# Altium PCB NBP1 Xilinx Spartan-IIE PQ208 Rev1.02.PcbDoc
Units mm, origin at the board's own origin, x right, y up, seen from the top; angles counter-clockwise.
Board outline 69 x 80.99 mm, 2 copper layers (Top Layer, Bottom Layer); 48 components, 166 nets, 518 pads, 189 vias.
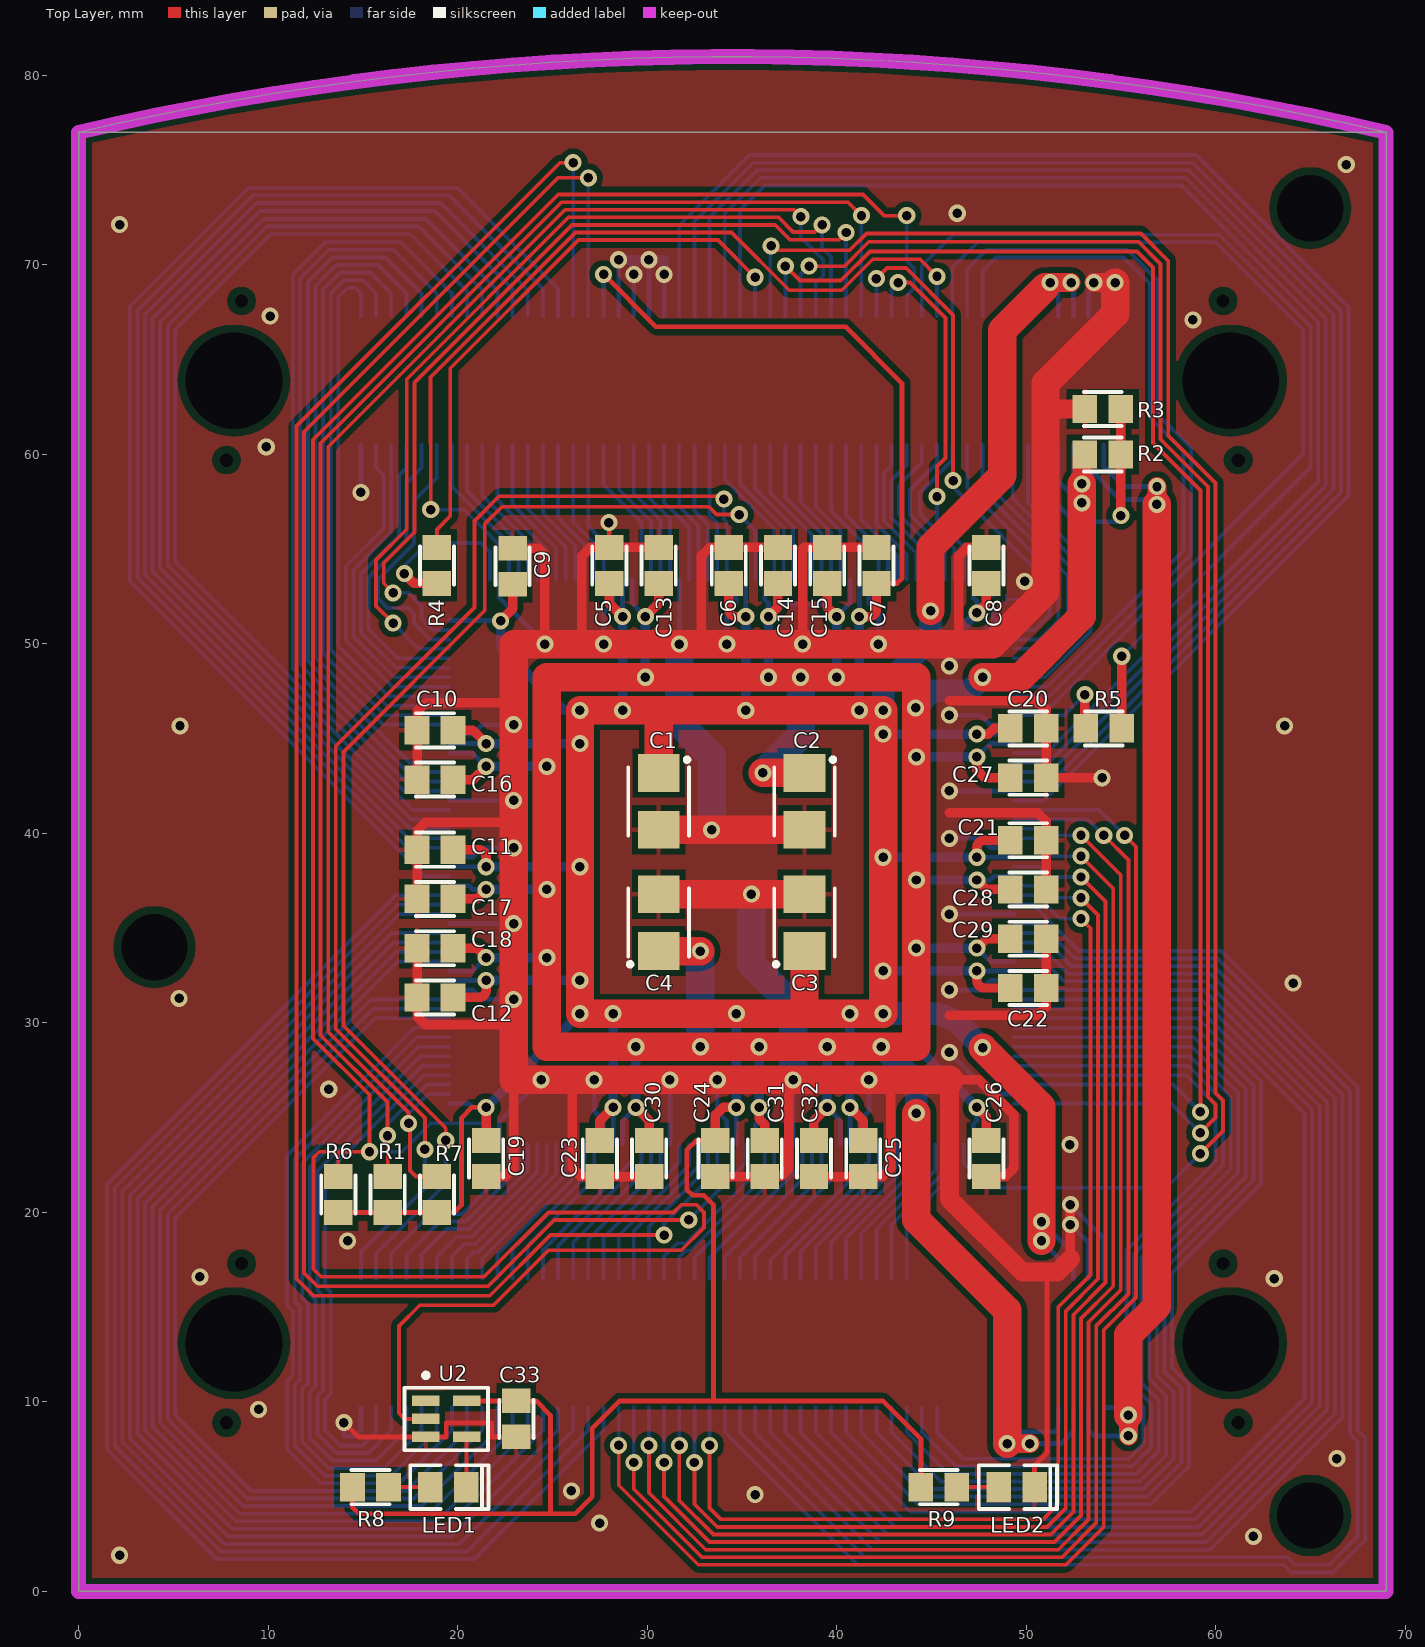
[diagram p0: Top Layer view]
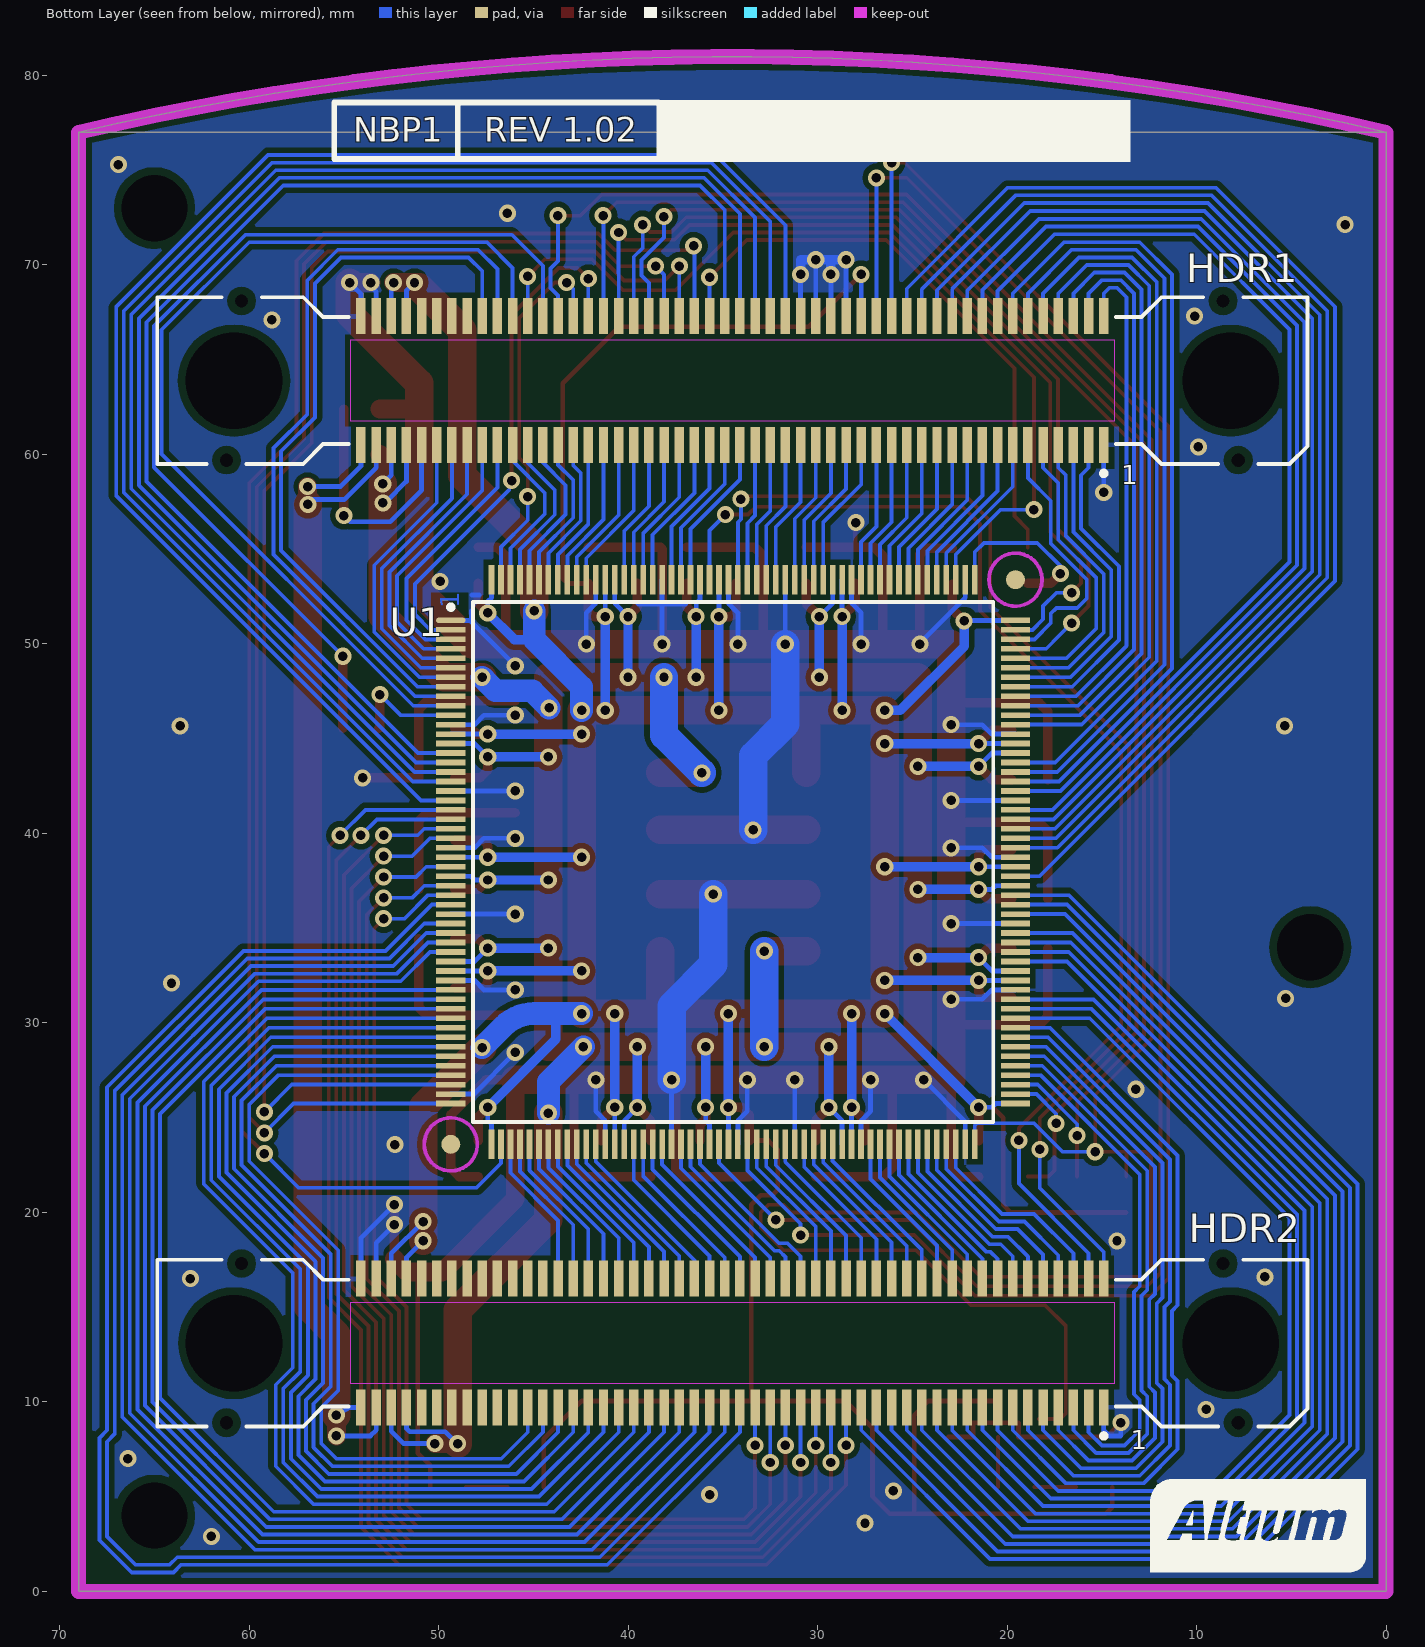
[diagram p1: Bottom Layer view, seen from below]

## Layer stack, top to bottom
Top Layer: signal copper 0.0356
Dielectric: core 0.32, FR-4, Dk 4.8
Bottom Layer: signal copper 0.0356

## Board outline
0,0 0,77 ccw(c0.001,77) 0.001,77 cw(c34.5,-69.801) 0.001,77 69,77 69,0

## Design rules (kind name [scope] priority, off if disabled: settings)
Clearance Clearance_Unplated_Pads [PadIsPlated = 'False'] p1: gap=0.4 // Slightly larger clearance around unplated holes
Clearance Clearance_Polygons [InPolygon] p2: gap=0.3 // Larger clearance for polygons
Clearance [All] p3: gap=0.2 // General clearance
ComponentClearance [All] p1: gap=0.2 collisioncheckmode=3 verticalgap=0.254 showdistances=FALSE
FabricationTestPointUsage TestPointUsage [All] p1 off: valid=0 allowmultiple=FALSE
FabricationTestpoint Testpoint [All] p1 off: side=3 testpointundercomponent=TRUE minsize=1.016 maxsize=2.54 preferedsize=1.524 minholesize=0 maxholesize=1.016 preferedholesize=0.813 testpointgrid=0.025 allowsidetop=TRUE allowsidebottom=TRUE usegrid=TRUE gridtolerance=0
Height MaxMinHeight [All] p1: minheight=0 maxheight=25.4 prefheight=12.7
HoleSize [All] p1: absolutevalues=TRUE maxlimit=5.1 minlimit=0.4 maxpercent=80.000 minpercent=20.000
PlaneClearance [All] p1: clearance=0.5
PlaneConnect [All] p1: planeconnectstyle=Relief reliefexpansion=0.5 reliefentries=4 reliefconductorwidth=0.25 reliefairgap=0.25
PolygonConnect PolygonConnect_ID_Pads [InPadClass('Satellite ID Pads')] p1: connectstyle=NoConnect reliefconductorwidth=0.254 reliefentries=4 polygonreliefangle="90 Angle" // Prevent polygons connecting to pads identifying type of Satellite PCB
PolygonConnect [All] p2: connectstyle=Relief reliefconductorwidth=0.25 reliefentries=4 polygonreliefangle="90 Angle"
RoutingCorners [All] p1: cornerstyle=45-Degree minsetback=2.5 maxsetback=2.5
RoutingVias [All] p1: holewidth=0.5 width=0.9 viastyle="Through Hole" minholewidth=0.5 minwidth=0.9 maxholewidth=0.5 maxwidth=0.9
SMDNeckDown [All] p1: percent=100.000
SilkscreenOverComponentPads [All] p1: minsilkscreentomaskgap=0.254
SolderMaskExpansion SolderMaskExpansion_Vias [IsVia] p1: expansion=-0.46
SolderMaskExpansion [All] p2: expansion=0.1
Width Width_Power [InNetClass('Power Nets')] p1: maxlimit=2.5 minlimit=0.15 preferedwidth=0.25
Width [All] p2: maxlimit=0.5 minlimit=0.2 preferedwidth=0.2
19 further rules are at their usual default settings.

## Classes and differential pairs
net class "Power Nets": 5V GND VCC VCCINT
pad class "Satellite ID Pads": HDR1-36 HDR1-38 HDR1-40 HDR1-42

## Components (designator, comment, footprint, x,y, rotation, side; value= is the part's Value field where it differs from the comment)
C1 "10uF" MCCT-B 30.608,41.692 r270 top locked
C2 "10uF" MCCT-B 38.308,41.692 r270 top locked
C3 "10uF" MCCT-B 38.308,35.292 r90 top locked
C4 "10uF" MCCT-B 30.608,35.292 r90 top locked
C5 "0.1uF" CC2012-0805 28.008,54.142 r270 top
C6 "0.1uF" CC2012-0805 34.308,54.142 r270 top
C7 "0.1uF" CC2012-0805 42.108,54.142 r270 top
C8 "0.1uF" CC2012-0805 47.908,54.142 r270 top
C9 "0.1uF" CC2012-0805 22.9,54.1 r270 top
C10 "0.1uF" CC2012-0805 18.808,45.442 r0 top
C11 "0.1uF" CC2012-0805 18.808,39.142 r0 top
C12 "0.1uF" CC2012-0805 18.808,31.342 r0 top
C13 "0.1uF" CC2012-0805 30.608,54.142 r270 top
C14 "0.1uF" CC2012-0805 36.908,54.142 r270 top
C15 "0.1uF" CC2012-0805 39.508,54.142 r270 top
C16 "0.1uF" CC2012-0805 18.808,42.842 r0 top
C17 "0.1uF" CC2012-0805 18.808,36.542 r0 top
C18 "0.1uF" CC2012-0805 18.808,33.942 r0 top
C19 "0.1uF" CC2012-0805 21.508,22.842 r270 top
C20 "0.1uF" CC2012-0805 50.108,45.542 r0 top
C21 "0.1uF" CC2012-0805 50.108,39.642 r0 top
C22 "0.1uF" CC2012-0805 50.108,31.842 r0 top
C23 "0.1uF" CC2012-0805 27.508,22.842 r270 top
C24 "0.1uF" CC2012-0805 33.608,22.842 r270 top
C25 "0.1uF" CC2012-0805 41.408,22.842 r270 top
C26 "0.1uF" CC2012-0805 47.908,22.842 r270 top
C27 "0.1uF" CC2012-0805 50.108,42.942 r0 top
C28 "0.1uF" CC2012-0805 50.108,37.042 r0 top
C29 "0.1uF" CC2012-0805 50.108,34.442 r0 top
C30 "0.1uF" CC2012-0805 30.108,22.842 r270 top
C31 "0.1uF" CC2012-0805 36.208,22.842 r270 top
C32 "0.1uF" CC2012-0805 38.808,22.842 r270 top
C33 "0.1uF" CC2012-0805 23.1,9.1 r270 top
HDR1 "54075-1009" 54075 34.5,63.9 r0 bottom locked
HDR2 "54075-1009" 54075 34.5,13.1 r0 bottom locked
LED1 "HSMG-C170" "SMD _LED" 19.5,5.5 r180 top locked
LED2 "HSMH-C170" "SMD _LED" 49.5,5.5 r180 top locked
R1 "4K7" CC2012-0805 16.308,20.942 r270 top
R2 "DO NOT INSTALL" CC2012-0805 54.05,60 r0 top
R3 "DO NOT INSTALL" CC2012-0805 54.05,62.4 r180 top
R4 "100R" CC2012-0805 18.908,54.142 r270 top
R5 "100R" CC2012-0805 54.1,45.542 r180 top
R6 "4K7" CC2012-0805 13.708,20.942 r270 top
R7 "4K7" CC2012-0805 18.908,20.942 r270 top
R8 "270R" CC2012-0805 15.4,5.5 r0 top
R9 "270R" CC2012-0805 45.4,5.5 r0 top
U1 "Spartan XC2S300E-6PQ208C" F-QFP28X28-G208/P.5N 34.458,38.492 r180 bottom locked
U2 "SN74LVC1G04DBV" SO-G5/P.95 19.4,9.1 r270 top

## Footprints (in the part's own frame and the unit in brackets; to place one, negate y for a bottom-side part, rotate by r counter-clockwise, add the part's x,y. Pads: shape width x height; smd on the part's side, far side on the other; paste and mask are expansions set on the pad)
54075 [mm] "Connector; Docking Station, Receptacle; 100 Position; Vertical"
  rect 0.5x1.9 smd: 1(-19.6,3.4) 2(-19.6,-3.4) 3(-18.8,3.4) 4(-18.8,-3.4) 5(-18,3.4) 6(-18,-3.4) 7(-17.2,3.4) 8(-17.2,-3.4) 9(-16.4,3.4) 10(-16.4,-3.4) 11(-15.6,3.4) 12(-15.6,-3.4) 13(-14.8,3.4) 14(-14.8,-3.4) 15(-14,3.4) 16(-14,-3.4) 17(-13.2,3.4) 18(-13.2,-3.4) 19(-12.4,3.4) 20(-12.4,-3.4) 21(-11.6,3.4) 22(-11.6,-3.4) 23(-10.8,3.4) 24(-10.8,-3.4) 25(-10,3.4) 26(-10,-3.4) 27(-9.2,3.4) 28(-9.2,-3.4) 29(-8.4,3.4) 30(-8.4,-3.4) 31(-7.6,3.4) 32(-7.6,-3.4) 33(-6.8,3.4) 34(-6.8,-3.4) 35(-6,3.4) 36(-6,-3.4) 37(-5.2,3.4) 38(-5.2,-3.4) 39(-4.4,3.4) 40(-4.4,-3.4) 41(-3.6,3.4) 42(-3.6,-3.4) 43(-2.8,3.4) 44(-2.8,-3.4) 45(-2,3.4) 46(-2,-3.4) 47(-1.2,3.4) 48(-1.2,-3.4) 49(-0.4,3.4) 50(-0.4,-3.4) 51(0.4,3.4) 52(0.4,-3.4) 53(1.2,3.4) 54(1.2,-3.4) 55(2,3.4) 56(2,-3.4) 57(2.8,3.4) 58(2.8,-3.4) 59(3.6,3.4) 60(3.6,-3.4) 61(4.4,3.4) 62(4.4,-3.4) 63(5.2,3.4) 64(5.2,-3.4) 65(6,3.4) 66(6,-3.4) 67(6.8,3.4) 68(6.8,-3.4) 69(7.6,3.4) 70(7.6,-3.4) 71(8.4,3.4) 72(8.4,-3.4) 73(9.2,3.4) 74(9.2,-3.4) 75(10,3.4) 76(10,-3.4) 77(10.8,3.4) 78(10.8,-3.4) 79(11.6,3.4) 80(11.6,-3.4) 81(12.4,3.4) 82(12.4,-3.4) 83(13.2,3.4) 84(13.2,-3.4) 85(14,3.4) 86(14,-3.4) 87(14.8,3.4) 88(14.8,-3.4) 89(15.6,3.4) 90(15.6,-3.4) 91(16.4,3.4) 92(16.4,-3.4) 93(17.2,3.4) 94(17.2,-3.4) 95(18,3.4) 96(18,-3.4) 97(18.8,3.4) 98(18.8,-3.4) 99(19.6,3.4) 100(19.6,-3.4)
  round 0.5 hole 0.7 unplated: MH1(-26.7,4.2) MH2(-25.9,-4.2) MH3(26.7,4.2) MH4(25.9,-4.2)
  round 4.8 hole 5.1 unplated: MH5(-26.3,0) MH6(26.3,0)
  Top Layer keep-out region: -20.15,2.15 20.15,2.15 20.15,-2.15 -20.15,-2.15
  silkscreen extent -30.35,-4.4 30.35,5.02
CC2012-0805 [mm]
  rect 1.3x1.5 smd: 1(-0.95,0) 2(0.95,0)
  silkscreen extent -1,-0.9 1,0.9
F-QFP28X28-G208/P.5N [mm]
  oval 1.55x0.3 smd: 1(-14.9,12.75)
  rect 1.55x0.3 smd: 2(-14.9,12.25) 3(-14.9,11.75) 4(-14.9,11.25) 5(-14.9,10.75) 6(-14.9,10.25) 7(-14.9,9.75) 8(-14.9,9.25) 9(-14.9,8.75) 10(-14.9,8.25) 11(-14.9,7.75) 12(-14.9,7.25) 13(-14.9,6.75) 14(-14.9,6.25) 15(-14.9,5.75) 16(-14.9,5.25) 17(-14.9,4.75) 18(-14.9,4.25) 19(-14.9,3.75) 20(-14.9,3.25) 21(-14.9,2.75) 22(-14.9,2.25) 23(-14.9,1.75) 24(-14.9,1.25) 25(-14.9,0.75) 26(-14.9,0.25) 27(-14.9,-0.25) 28(-14.9,-0.75) 29(-14.9,-1.25) 30(-14.9,-1.75) 31(-14.9,-2.25) 32(-14.9,-2.75) 33(-14.9,-3.25) 34(-14.9,-3.75) 35(-14.9,-4.25) 36(-14.9,-4.75) 37(-14.9,-5.25) 38(-14.9,-5.75) 39(-14.9,-6.25) 40(-14.9,-6.75) 41(-14.9,-7.25) 42(-14.9,-7.75) 43(-14.9,-8.25) 44(-14.9,-8.75) 45(-14.9,-9.25) 46(-14.9,-9.75) 47(-14.9,-10.25) 48(-14.9,-10.75) 49(-14.9,-11.25) 50(-14.9,-11.75) 51(-14.9,-12.25) 52(-14.9,-12.75) 105(14.9,-12.75) 106(14.9,-12.25) 107(14.9,-11.75) 108(14.9,-11.25) 109(14.9,-10.75) 110(14.9,-10.25) 111(14.9,-9.75) 112(14.9,-9.25) 113(14.9,-8.75) 114(14.9,-8.25) 115(14.9,-7.75) 116(14.9,-7.25) 117(14.9,-6.75) 118(14.9,-6.25) 119(14.9,-5.75) 120(14.9,-5.25) 121(14.9,-4.75) 122(14.9,-4.25) 123(14.9,-3.75) 124(14.9,-3.25) 125(14.9,-2.75) 126(14.9,-2.25) 127(14.9,-1.75) 128(14.9,-1.25) 129(14.9,-0.75) 130(14.9,-0.25) 131(14.9,0.25) 132(14.9,0.75) 133(14.9,1.25) 134(14.9,1.75) 135(14.9,2.25) 136(14.9,2.75) 137(14.9,3.25) 138(14.9,3.75) 139(14.9,4.25) 140(14.9,4.75) 141(14.9,5.25) 142(14.9,5.75) 143(14.9,6.25) 144(14.9,6.75) 145(14.9,7.25) 146(14.9,7.75) 147(14.9,8.25) 148(14.9,8.75) 149(14.9,9.25) 150(14.9,9.75) 151(14.9,10.25) 152(14.9,10.75) 153(14.9,11.25) 154(14.9,11.75) 155(14.9,12.25) 156(14.9,12.75)
  rect 0.3x1.55 smd: 53(-12.75,-14.9) 54(-12.25,-14.9) 55(-11.75,-14.9) 56(-11.25,-14.9) 57(-10.75,-14.9) 58(-10.25,-14.9) 59(-9.75,-14.9) 60(-9.25,-14.9) 61(-8.75,-14.9) 62(-8.25,-14.9) 63(-7.75,-14.9) 64(-7.25,-14.9) 65(-6.75,-14.9) 66(-6.25,-14.9) 67(-5.75,-14.9) 68(-5.25,-14.9) 69(-4.75,-14.9) 70(-4.25,-14.9) 71(-3.75,-14.9) 72(-3.25,-14.9) 73(-2.75,-14.9) 74(-2.25,-14.9) 75(-1.75,-14.9) 76(-1.25,-14.9) 77(-0.75,-14.9) 78(-0.25,-14.9) 79(0.25,-14.9) 80(0.75,-14.9) 81(1.25,-14.9) 82(1.75,-14.9) 83(2.25,-14.9) 84(2.75,-14.9) 85(3.25,-14.9) 86(3.75,-14.9) 87(4.25,-14.9) 88(4.75,-14.9) 89(5.25,-14.9) 90(5.75,-14.9) 91(6.25,-14.9) 92(6.75,-14.9) 93(7.25,-14.9) 94(7.75,-14.9) 95(8.25,-14.9) 96(8.75,-14.9) 97(9.25,-14.9) 98(9.75,-14.9) 99(10.25,-14.9) 100(10.75,-14.9) 101(11.25,-14.9) 102(11.75,-14.9) 103(12.25,-14.9) 104(12.75,-14.9) 157(12.75,14.9) 158(12.25,14.9) 159(11.75,14.9) 160(11.25,14.9) 161(10.75,14.9) 162(10.25,14.9) 163(9.75,14.9) 164(9.25,14.9) 165(8.75,14.9) 166(8.25,14.9) 167(7.75,14.9) 168(7.25,14.9) 169(6.75,14.9) 170(6.25,14.9) 171(5.75,14.9) 172(5.25,14.9) 173(4.75,14.9) 174(4.25,14.9) 175(3.75,14.9) 176(3.25,14.9) 177(2.75,14.9) 178(2.25,14.9) 179(1.75,14.9) 180(1.25,14.9) 181(0.75,14.9) 182(0.25,14.9) 183(-0.25,14.9) 184(-0.75,14.9) 185(-1.25,14.9) 186(-1.75,14.9) 187(-2.25,14.9) 188(-2.75,14.9) 189(-3.25,14.9) 190(-3.75,14.9) 191(-4.25,14.9) 192(-4.75,14.9) 193(-5.25,14.9) 194(-5.75,14.9) 195(-6.25,14.9) 196(-6.75,14.9) 197(-7.25,14.9) 198(-7.75,14.9) 199(-8.25,14.9) 200(-8.75,14.9) 201(-9.25,14.9) 202(-9.75,14.9) 203(-10.25,14.9) 204(-10.75,14.9) 205(-11.25,14.9) 206(-11.75,14.9) 207(-12.25,14.9) 208(-12.75,14.9)
  round 1 smd paste-0.51 mask+1: FID1(-14.9,-14.9) FID2(14.9,14.9)
  Top Layer keep-out circle w0.2: c-14.9,-14.9 r1.4
  Top Layer keep-out circle w0.2: c14.9,14.9 r1.4
  silkscreen extent -15.03,-13.72 13.73,13.73
MCCT-B [mm]
  rect 2x2.2 smd: 1(-1.5,0) 2(1.5,0)
  silkscreen extent -2.3,-1.6 1.8,1.6
"SMD _LED" [mm]
  rect 1.3x1.6 smd: 1(0.95,0) 2(-0.95,0)
  silkscreen extent -2.13,-1.15 2,1.15
SO-G5/P.95 [mm]
  rect 0.55x1.45 smd: 1(-0.95,-1.075) 2(0,-1.075) 3(0.95,-1.075) 4(0.95,1.075) 5(-0.95,1.075)
  silkscreen extent -2.42,-2.2 1.65,2.2

## Part data
C1 C2 C3 C4: library part CAP_POLAR, "Polar Capacitor"
C5 C6 C7 C8 C9 C10 C11 C12 C13 C14 C15 C16 C17 C18 C19 C20 C21 C22 C23 C24 C25 C26 C27 C28 C29 C30 C31 C32 C33: library part CAP, "Capacitor"
HDR1 HDR2: "Board-to-Board, Docking Station, 0.80mm (.031\") Pitch, Shielded Receptacle, Vertical, Ultra Low Profile, SMT"
LED1 LED2: library part HSMX-C670, "Typical RED GaAs SMD LED Agilent make"
R1 R2 R3 R4 R5 R6 R7 R8 R9: library part RES, "Resistor"
U1: library part XC2S300E-6PQ208I, "1.8V Field-Programmable Gate Array"
U2: library part SN74AHC1G04DBVR

## Free pads (board coordinates)
  round 3.2 hole 3.5 unplated: LP(4,34) LP(65,4) LP(65,73)

## Via types
v1: diameter 0.9, hole 0.5, Top Layer to Bottom Layer, 189 vias

## Nets (pads, with @x,y where several pads share a name; then routed paths per layer and width w, separated by ;. In a path a pad name is that pad's centre, name@x,y a point inside that pad or via, vN(x,y) a via of type N, cw(c..) or ccw(c..) an arc to the next point about the centre after c; other vN are vias at no path point)
5V: HDR1.97 HDR1.99 HDR2.97 HDR2.99 | length 65.5
  Top Layer w1: v1(55.4,8.2) v1(55.4,9.3) ; v1(56.9,57.364) v1(56.911,58.304)
  Top Layer w1.5: v1(55.4,9.3) 55.4,13.538 56.9,15.038 v1(56.9,57.364)
  Bottom Layer w0.25: HDR2.97 53.3,8.5 53.6,8.2 v1(55.4,8.2) ; HDR1.97 53.3,59.3 54.982,57.618 56.646,57.618 v1(56.9,57.364) ; HDR2.99 54.7,9.7 v1(55.4,9.3) ; HDR1.99 54.1,59.375 54.77,58.718 55.184,58.304 v1(56.911,58.304)
AUDIO_SPI_CSN: HDR1.11 U1.154 | length 14.3
  Bottom Layer w0.2: HDR1.11 18.9,58.761 17.7,57.561 17.7,55.3 15.8,53.4 15.8,52.4 16.3,51.9 17.4,51.9 17.7,51.6 17.7,51.1 18.558,50.242 U1.154
BLUE0: HDR1.14 U1.139 | length 42.9
  Bottom Layer w0.2: U1.139 17.258,42.742 11.3,48.7 11.3,69.5 13,71.2 17,71.2 19.7,68.5 HDR1.14
BLUE1: HDR1.16 U1.138 | length 51.8
  Bottom Layer w0.2: U1.138 17.177,42.242 5.1,54.319 5.1,66.6 10.125,71.625 17.5,71.625 20.5,68.625 HDR1.16
BOC_CTS: HDR1.13 U1.160 | length 8.6
  Bottom Layer w0.2: HDR1.13 19.7,58.3 23.208,54.792 U1.160
BOC_RTS: HDR1.17 U1.162 | length 8.3
  Bottom Layer w0.2: HDR1.17 21.3,57.831 24.208,54.923 U1.162
BOC_RX: HDR1.19 U1.163 | length 8.2
  Bottom Layer w0.2: HDR1.19 22.1,57.597 24.708,54.989 U1.163
BOC_TX: HDR1.15 U1.161 | length 8.4
  Bottom Layer w0.2: HDR1.15 20.5,58.065 23.708,54.857 U1.161
BUZZER: HDR2.24 U1.93 | length 8.5
  Bottom Layer w0.2: HDR2.24 23.7,18.26 27.208,21.768 U1.93
CAN_RXD: HDR1.4 U1.147 | length 30.5
  Bottom Layer w0.2: HDR1.4 15.7,68.5 15,69.2 14,69.2 13.3,68.5 13.3,49.7 16.258,46.742 U1.147
CAN_TXD: HDR1.2 U1.148 | length 28.1
  Bottom Layer w0.2: HDR1.2 14.9,68.5 14.6,68.8 14.2,68.8 13.7,68.3 13.7,49.9 16.358,47.242 U1.148
FPGA_CCLK: HDR1.66 U1.155 | length 47.3
  Top Layer w0.2: v1(16.6,52.7) 16.1,53.2 16.1,54.272 17.719,55.891 17.719,63.79 26.044,72.115 36.768,72.115 37.549,71.334 40.122,71.334 v1(40.503,71.715)
  Bottom Layer w0.2: v1(16.6,52.7) 17.4,52.7 18.1,52 18.1,51.3 18.658,50.742 U1.155 ; HDR1.66 v1(40.503,71.715)
FPGA_CLK: HDR2.2 U1.182 | length 64.5
  Top Layer w0.2: v1(18.275,23.325) 18.275,24.979 13.571,29.683 13.571,44.606 20.894,51.928 20.894,56.496 22.197,57.8 33.895,57.8 v1(34.051,57.643)
  Bottom Layer w0.2: HDR2.2 14.9,17.918 18.275,21.293 v1(18.275,23.325) ; v1(34.051,57.643) 34.051,56.577 34.208,56.42 U1.182
FPGA_CLK_1: HDR1.30 U1.80 | length 100.5
  Top Layer w0.2: v1(26.1,75.4) 25.4,75.4 11.5,61.5 11.5,16.5 12.4,15.6 21.7,15.6 24.9,18.8 v1(30.9,18.8)
  Bottom Layer w0.2: HDR1.30 v1(26.1,75.4) ; v1(30.9,18.8) 30.9,19.4 33.708,22.208 U1.80
FPGA_CLK_2: HDR1.32 U1.77 | length 99.5
  Top Layer w0.2: v1(26.9,74.6) 25.3,74.6 11.9,61.2 11.9,16.8 12.6,16.1 21.6,16.1 25.1,19.6 v1(32.2,19.6)
  Bottom Layer w0.2: HDR1.32 v1(26.9,74.6) ; v1(32.2,19.6) 35.208,22.608 U1.77
FPGA_DIN: HDR1.64 U1.153 | length 48.4
  Top Layer w0.2: v1(16.6,51.1) 15.7,52 15.7,54.438 17.312,56.05 17.312,63.968 25.86,72.515 36.934,72.515 37.709,71.74 38.852,71.74 v1(39.233,72.121)
  Bottom Layer w0.2: v1(16.6,51.1) 17.933,49.742 U1.153 ; v1(39.233,72.121) 39.233,70.9 39.7,70.433 HDR1.64
FPGA_DONE: HDR1.74 R6.1 U1.104 U2.2 | length 147.6
  Top Layer w0.2: 13.7,23.2 R6.1 ; U2.2 17.2,9.1 16.9,9.4 16.9,14 18,15.1 21.9,15.1 24.8,18 31.8,18 33,19.2 33,20 32.6,20.4 31.8,20.4 31.4,20 24.8,20 21.4,16.6 12.8,16.6 12.4,17 12.4,22.9 12.7,23.2 v1(15.35,23.2) 15.35,26.207 12.371,29.186 12.371,60.779 25.313,73.722 41.392,73.722 42.509,72.604 v1(43.703,72.604)
  Bottom Layer w0.2: v1(15.35,23.2) 17.083,23.2 18.586,24.703 21.597,24.703 21.708,24.592 U1.104 ; HDR1.74 43.7,68.385 44.1,68.785 44.1,69.819 43.703,70.216 v1(43.703,72.604)
FPGA_INIT: HDR1.68 R1.1 U1.107 | length 84.6
  Top Layer w0.2: v1@16.3,24.075 16.3,25.823 12.771,29.351 12.771,60.595 25.491,73.315 40.604,73.315 v1(41.315,72.604) ; R1.1 v1@16.308,24.05
  Bottom Layer w0.2: v1(16.3,24.05) 16.3,24.656 18.387,26.742 U1.107 ; HDR1.68 41.3,72.385 v1@41.519,72.604 ; v1@41.315,72.4 v1(41.315,72.604)
FPGA_M0: HDR1.60 U1.52 | length 80.3
  Top Layer w0.2: v1(38.547,69.937) 40.413,69.937 41.701,71.226 55.927,71.226 57.1,70.053 57.1,60.8 59.6,58.3 59.6,26.1 60,25.7 60,25 v1(59.2,24.2)
  Bottom Layer w0.2: HDR1.60 38.1,69.49 v1(38.547,69.937) ; U1.52 57.658,25.742 v1(59.2,24.2)
FPGA_M1: HDR1.58 U1.50 | length 79.4
  Top Layer w0.2: v1(37.3,69.939) 38.064,69.175 40.216,69.175 41.756,70.715 55.852,70.715 56.7,69.867 56.7,60.6 59.2,58.1 v1(59.2,25.3)
  Bottom Layer w0.2: HDR1.58 v1(37.3,69.939) ; U1.50 57.758,26.742 v1(59.2,25.3)
FPGA_M2: HDR1.56 U1.54 | length 89.9
  Top Layer w0.2: v1(36.54,71.004) 36.286,70.775 40.685,70.775 41.574,71.664 56.059,71.664 57.5,70.223 57.5,61 60,58.5 60,26.3 60.4,25.9 60.4,24.3 v1(59.2,23.1)
  Bottom Layer w0.2: HDR1.56 36.5,70.964 v1(36.54,71.004) v1@36.5,70.908 ; U1.54 46.708,22.592 48,21.3 57.4,21.3 v1(59.2,23.1)
FPGA_PROGRAM: HDR1.62 R7.1 U1.106 | length 80.9
  Top Layer w0.2: R7.1 17.808,21.892 17.492,22.208 17.492,24.742 v1(17.414,24.7) 17.414,25.274 13.171,29.517 13.171,60.411 25.675,72.915 37.753,72.915 v1(38.115,72.553)
  Bottom Layer w0.2: v1(17.414,24.7) 17.414,25.204 18.452,26.242 U1.106 ; v1(38.115,72.553) 38.115,71.452 39.3,70.267 39.3,69.446 38.9,69.046 HDR1.62
FPGA_TCK: HDR1.72 U1.207 | length 19.8
  Top Layer w0.2: v1(43.246,69.073) 43.874,69.073 45.75,67.197 45.75,59.817 45.3,59.367 v1(45.3,57.775)
  Bottom Layer w0.2: HDR1.72 42.9,68.728 v1(43.246,69.073) ; v1(45.3,57.775) 45.3,56.526 46.708,55.118 ; U1.207 46.712,55.118
FPGA_TDI: HDR1.78 U1.159 | length 47.7
  Top Layer w0.2: v1(18.582,57.085) 18.575,64.075 25.187,70.687 26.215,71.715 34.457,71.715 37.505,68.667 40.274,68.667 41.909,70.302 44.398,70.302 v1(45.3,69.4)
  Bottom Layer w0.2: v1(18.582,57.085) 20.349,57.085 22.708,54.726 U1.159 ; HDR1.78 v1(45.3,69.4)
FPGA_TDO: HDR1.54 R4.1 | length 31.5
  Top Layer w0.2: R4.1 18.908,56.043 19.613,56.749 19.613,64.548 26.381,71.315 33.74,71.315 v1(35.702,69.353)
  Bottom Layer w0.2: HDR1.54 v1(35.702,69.353)
FPGA_TDO#: R4.2 U1.157 | length 9
  Top Layer w0.5: v1(17.185,53.706) 17.699,53.192 R4.2
  Bottom Layer w0.2: v1(17.185,53.706) 17.185,54.113 18.405,55.332 21.224,55.332 21.708,54.848 U1.157
FPGA_TMS: HDR1.70 U1.2 | length 27.4
  Top Layer w0.2: v1(42.103,69.277) 42.661,69.835 43.678,69.835 46.15,67.363 v1(46.15,58.625)
  Bottom Layer w0.2: HDR1.70 v1(42.103,69.277) v1@42.1,69.274 ; v1(46.15,58.625) 46.27,58.15 51.25,53.17 51.25,51.55 50.442,50.742 U1.2
GND: C1.2 C2.2 C3.2 C4.2 C5.1 C6.1 C7.1 C8.1 C9.1 C10.1 C11.1 C12.1 C13.1 C14.1 C15.1 C16.1 C17.1 C18.1 C19.2 C20.2 C21.2 C22.2 C23.2 C24.2 C25.2 C26.2 C27.2 C28.2 C29.2 C30.2 C31.2 C32.2 C33.2 HDR1.1 HDR1.36 HDR1.38 HDR1.40 HDR1.42 HDR1.98 HDR1.100 HDR2.1 HDR2.98 HDR2.100 LED2.2 R3.2 U1.1 U1.12 U1.19 U1.25 U1.32 U1.39 U1.51 U1.65 U1.72 U1.79 U1.85 U1.92 U1.103 U1.117 U1.124 U1.131 U1.137 U1.144 U1.158 U1.170 U1.177 U1.183 U1.190 U1.197 U2.3 | length 434.5
  Top Layer w0.25: v1(14,8.9) 14.75,8.15 19.4,8.15 19.4,8.9 21.8,8.9 21.8,8.15 C33.2 ; v1(27.98,56.399) 28.008,56.371 C5.1 ; LED2.2 50.45,6.65 51.1,7.3 51.1,16.85
  Top Layer w0.5: C18.1 17.858,30.342 18.308,29.892 22.958,29.892 ; C17.1 17.858,40.142 18.308,40.592 22.958,40.592 ; C16.1 17.858,46.442 18.308,46.892 22.958,46.892 ; C19.2 22.508,21.892 22.958,22.342 22.958,26.992 ; C9.1 24.277,55.05 24.602,54.725 v1(24.602,49.992) ; 26.058,26.992 26.058,22.342 26.508,21.892 C30.2 ; 26.558,49.992 26.558,54.642 27.008,55.092 C13.1 ; 32.858,49.992 32.858,54.642 33.308,55.092 C14.1 ; C24.2 C31.2 37.06,21.892 37.48,22.312 37.48,26.764 v1(37.708,26.992) ; v1(38.208,49.992) 38.208,55.008 38.292,55.092 C7.1 ; C32.2 42.408,21.892 42.858,22.342 42.858,26.992 ; 45.958,26.992 47.508,26.992 49.358,25.142 49.358,22.342 48.908,21.892 C26.2 ; 45.958,30.392 50.608,30.392 51.058,30.842 C29.2 ; 45.958,41.092 50.608,41.092 51.058,40.642 C28.2 ; 45.958,46.992 50.608,46.992 51.058,46.542 C27.2 54.01,42.942 v1(54.015,42.937) ; 46.458,49.992 46.458,54.642 46.908,55.092 C8.1 ; 52.339,17.537 v1(52.339,20.407)
  Top Layer w1: 45.958,26.992 45.958,20.707 49.815,16.85 51.652,16.85 52.339,17.537 ; 51.069,62.4 R3.2 ; v1(53.575,69.075) v1(54.7,69.075)
  Top Layer w1.5: C4.2 C3.2 ; C1.2 C2.2 ; 45.958,26.992 22.958,26.992 22.958,49.992 48.25,49.992 51.025,52.767 51.025,63.75 54.701,67.418 v1(54.7,69.075)
  Bottom Layer w0.25: v1(14,8.9) 14,8.2 14.6,8.2 14.9,8.5 HDR2.1 ; v1(14.9,58) HDR1.1 ; U1.117 20.808,31.742 21.308,31.242 v1(22.958,31.242) ; U1.124 v1(22.958,35.242) ; U1.131 20.808,38.742 21.308,39.242 v1(22.958,39.242) ; U1.137 v1(22.958,41.742) ; U1.144 20.808,45.242 21.308,45.742 v1(22.958,45.742) ; U1.103 22.208,24.792 v1(24.408,26.992) ; U1.158 22.208,52.436 v1@24.602,50.042 ; v1(27.208,26.992) 27.208,25.342 27.708,24.842 U1.92 ; v1(27.708,49.992) 27.708,51.642 28.208,52.142 U1.170 ; HDR1.36 28.5,70.1 v1(28.5,70.275) ; HDR1.38 v1(29.3,69.5) ; HDR1.40 30.1,70.1 v1(30.1,70.275) ; HDR1.42 v1(30.9,69.5) ; U1.85 v1(31.208,26.992) ; v1(31.708,49.992) U1.177 ; v1(33.708,26.992) 33.708,25.342 34.208,24.842 U1.79 ; v1(34.208,49.992) 34.208,51.642 34.708,52.142 U1.183 ; 36.972,52.106 39.461,52.106 ; U1.72 v1(37.708,26.992) ; v1(38.208,49.992) U1.190 ; U1.65 41.208,24.842 41.708,25.342 v1(41.708,26.992) ; U1.197 41.708,52.142 42.208,51.642 v1(42.208,49.992) ; v1(45.958,28.442) 48.158,26.242 U1.51 ; v1(45.958,31.742) 47.608,31.742 48.108,32.242 U1.39 ; v1(45.958,35.742) U1.32 ; v1(45.958,39.742) 47.608,39.742 48.108,39.242 U1.25 ; v1(45.958,42.242) U1.19 ; v1(45.958,46.242) 47.608,46.242 48.108,45.742 U1.12 ; v1(45.958,48.842) 48.278,51.163 48.358,51.242 U1.1 ; 47.869,52.589 48.25,52.589 ; 48.275,51.166 48.275,51.751 ; v1(52.339,19.357) 53.3,18.396 HDR2.98 ; v1(52.339,20.407) 54.1,18.646 HDR2.100 ; HDR1.98 53.3,68.575 53.687,68.962 53.75,69.025 v1(53.575,69.075) ; HDR1.100 54.1,68.475 v1(54.7,69.075)
  Bottom Layer w0.5: v1(28.5,70.275) 29.3,70.275 ; v1@29.275,69.5 v1@29.325,69.5 ; v1(29.3,69.5) 29.3,70.275 ; v1(30.9,69.5) 30.9,70.275 v1(30.1,70.275) 29.3,70.275
  Bottom Layer w1.5: v1(31.708,49.992) 31.708,45.792 33.408,44.092 v1(33.408,40.192) ; v1(35.508,36.792) 35.508,33.092 37.708,30.892 v1(37.708,26.992)
  other v1: 2.159,1.905 62,2.9 27.5,3.6 35.7,5.1 26,5.3 66.4,7 9.5,9.6 63.1,16.5 6.4,16.6 14.2,18.5 52.314,23.582 13.2,26.5 5.3,31.3 64.1,32.1 5.349,45.68 63.642,45.68 49.926,53.3 9.9,60.4 58.8,67.1 10.1,67.3 2.159,72.136 46.37,72.731 66.9,75.3
GREEN0: HDR1.10 U1.141 | length 38.2
  Bottom Layer w0.2: HDR1.10 18.1,68.5 16.2,70.4 13.4,70.4 12.1,69.1 12.1,49.1 17.458,43.742 U1.141
GREEN1: HDR1.12 U1.140 | length 40.6
  Bottom Layer w0.2: HDR1.12 18.9,68.5 16.6,70.8 13.2,70.8 11.7,69.3 11.7,48.9 17.358,43.242 U1.140
HDRIVE: HDR1.18 U1.136 | length 54.4
  Bottom Layer w0.2: U1.136 17.611,41.242 4.7,54.153 4.7,66.8 9.925,72.025 17.95,72.025 21.3,68.675 HDR1.18
IO0: HDR2.7 U1.110 | length 31.8
  Bottom Layer w0.2: HDR2.7 17.3,8.5 15.7,6.9 13.4,6.9 12.2,8.1 12.2,10.5 12.5,10.8 12.5,15.4 12.2,15.7 12.2,22.4 18.042,28.242 U1.110
IO1: HDR2.9 U1.111 | length 34.2
  Bottom Layer w0.2: HDR2.9 18.1,8.5 16.1,6.5 13.2,6.5 11.8,7.9 11.8,10.7 12.1,11 12.1,15.2 11.8,15.5 11.8,22.6 17.942,28.742 U1.111
IO2: HDR2.11 U1.112 | length 36.5
  Bottom Layer w0.2: HDR2.11 18.9,8.5 16.5,6.1 13,6.1 11.4,7.7 11.4,10.9 11.7,11.2 11.7,15 11.4,15.3 11.4,22.8 17.842,29.242 U1.112
IO3: HDR2.13 U1.113 | length 38.9
  Bottom Layer w0.2: U1.113 17.742,29.742 11,23 11,15.1 11.3,14.8 11.3,11.4 11,11.1 11,7.5 12.8,5.7 16.9,5.7 19.7,8.5 HDR2.13
IO4: HDR2.15 U1.114 | length 48.8
  Bottom Layer w0.2: U1.114 15.642,30.242 5.1,19.7 5.1,9.3 9.1,5.3 17.3,5.3 20.5,8.5 HDR2.15
IO5: HDR2.17 U1.115 | length 51.2
  Bottom Layer w0.2: U1.115 15.542,30.742 4.7,19.9 4.7,9.1 8.9,4.9 17.7,4.9 21.3,8.5 HDR2.17
IO6: HDR2.19 U1.116 | length 53.6
  Bottom Layer w0.2: U1.116 15.442,31.242 4.3,20.1 4.3,8.9 8.7,4.5 18.1,4.5 22.1,8.5 HDR2.19
IO7: HDR2.21 U1.120 | length 56.5
  Bottom Layer w0.2: U1.120 16.842,33.242 3.9,20.3 3.9,8.7 8.5,4.1 18.5,4.1 22.9,8.5 HDR2.21
IO8: HDR2.23 U1.121 | length 58.9
  Bottom Layer w0.2: U1.121 16.742,33.742 3.5,20.5 3.5,8.5 8.3,3.7 18.9,3.7 23.7,8.5 HDR2.23
IO9: HDR2.25 U1.122 | length 61.3
  Bottom Layer w0.2: U1.122 16.642,34.242 3.1,20.7 3.1,8.3 8.1,3.3 19.3,3.3 24.5,8.5 HDR2.25
IO10: HDR2.27 U1.123 | length 63.7
  Bottom Layer w0.2: U1.123 16.542,34.742 2.7,20.9 2.7,8.1 7.9,2.9 19.7,2.9 25.3,8.5 HDR2.27
IO11: HDR2.29 U1.125 | length 66.2
  Bottom Layer w0.2: U1.125 16.942,35.742 2.3,21.1 2.3,7.9 7.7,2.5 20.1,2.5 26.1,8.5 HDR2.29
IO12: HDR2.31 U1.126 | length 68.6
  Bottom Layer w0.2: U1.126 16.842,36.242 1.9,21.3 1.9,7.7 7.5,2.1 20.5,2.1 26.9,8.5 HDR2.31
IO13: HDR2.33 U1.127 | length 71
  Bottom Layer w0.2: U1.127 16.742,36.742 1.5,21.5 1.5,7.5 7.3,1.7 20.9,1.7 27.7,8.5 HDR2.33
IO14: HDR2.35 U1.21 | length 76.1
  Top Layer w0.2: v1(28.5,7.7) 28.5,5.6 32.7,1.4 52.1,1.4 54.1,3.4 54.1,13.8 55.8,15.5 55.8,39.3 v1(55.2,39.9)
  Bottom Layer w0.2: v1(28.5,7.7) HDR2.35 ; U1.21 53.858,41.242 v1(55.2,39.9)
IO15: HDR2.37 U1.22 | length 73.6
  Top Layer w0.2: v1(29.3,6.8) 29.3,5.4 32.9,1.8 51.9,1.8 53.7,3.6 53.7,14 55.4,15.7 55.4,38.6 v1(54.1,39.9)
  Bottom Layer w0.2: v1(29.3,6.8) HDR2.37 ; U1.22 53.258,40.742 v1(54.1,39.9)
IO16: HDR2.39 U1.23 | length 71
  Top Layer w0.2: v1(30.1,7.7) 30.1,5.2 33.1,2.2 51.7,2.2 53.3,3.8 53.3,14.2 55,15.9 55,37.8 v1(52.9,39.9)
  Bottom Layer w0.2: v1(30.1,7.7) HDR2.39 ; U1.23 50.758,40.242 51.1,39.9 v1(52.9,39.9)
IO17: HDR2.41 U1.24 | length 68.4
  Top Layer w0.2: v1(30.9,6.8) 30.9,5 33.3,2.6 51.5,2.6 52.9,4 52.9,14.4 54.6,16.1 54.6,37.1 v1(52.9,38.8)
  Bottom Layer w0.2: v1(30.9,6.8) HDR2.41 ; U1.24 50.458,39.742 51.4,38.8 v1(52.9,38.8)
IO18: HDR2.43 U1.27 | length 65.5
  Top Layer w0.2: v1(31.7,7.7) 31.7,4.8 33.5,3 51.3,3 52.5,4.2 52.5,14.6 54.2,16.3 54.2,36.4 v1(52.9,37.7)
  Bottom Layer w0.2: v1(31.7,7.7) HDR2.43 ; U1.27 50.658,38.242 51.2,37.7 v1(52.9,37.7)
IO19: HDR2.45 U1.29 | length 62.7
  Top Layer w0.2: v1(32.5,6.8) 32.5,4.6 33.7,3.4 51.1,3.4 52.1,4.4 52.1,14.8 53.8,16.5 53.8,35.7 v1(52.9,36.6)
  Bottom Layer w0.2: v1(32.5,6.8) HDR2.45 ; U1.29 50.758,37.242 51.4,36.6 v1(52.9,36.6)
IO20: HDR2.47 U1.30 | length 60.1
  Top Layer w0.2: v1(33.3,7.7) 33.3,4.4 33.9,3.8 50.9,3.8 51.7,4.6 51.7,15 53.4,16.7 53.4,35 v1(52.9,35.5)
  Bottom Layer w0.2: v1(33.3,7.7) HDR2.47 ; U1.30 50.558,36.742 51.8,35.5 v1(52.9,35.5)
IO21: HDR2.49 U1.31 | length 85.1
  Bottom Layer w0.2: HDR2.49 34.1,8.4 41.1,1.4 63.6,1.4 64,1 66.2,1 67.9,2.7 67.9,8.1 67.5,8.5 67.5,26.6 60.3,33.8 52.8,33.8 50.358,36.242 U1.31
IO22: HDR2.51 U1.33 | length 82.5
  Bottom Layer w0.2: HDR2.51 34.9,8.4 41.5,1.8 63.8,1.8 64.2,1.4 66,1.4 67.5,2.9 67.5,7.9 67.1,8.3 67.1,26.4 60.1,33.4 52.6,33.4 50.758,35.242 U1.33
IO23: HDR2.53 U1.34 | length 75.6
  Bottom Layer w0.2: HDR2.53 35.7,8.4 41.9,2.2 59.7,2.2 66.7,9.2 66.7,26.2 59.9,33 52.4,33 50.658,34.742 U1.34
IO24: HDR2.55 U1.35 | length 73.3
  Bottom Layer w0.2: HDR2.55 36.5,8.4 42.3,2.6 59.5,2.6 66.3,9.4 66.3,26 59.7,32.6 52.2,32.6 50.558,34.242 U1.35
IO25: HDR2.57 U1.36 | length 70.9
  Bottom Layer w0.2: HDR2.57 37.3,8.4 42.7,3 59.3,3 65.9,9.6 65.9,25.8 59.5,32.2 52,32.2 50.458,33.742 U1.36
IO26: HDR2.59 U1.40 | length 67.9
  Bottom Layer w0.2: HDR2.59 38.1,8.4 43.1,3.4 59.1,3.4 65.5,9.8 65.5,25.6 59.358,31.742 U1.40
IO27: HDR2.61 U1.41 | length 65.5
  Bottom Layer w0.2: HDR2.61 38.9,8.4 43.5,3.8 58.9,3.8 65.1,10 65.1,25.4 59.258,31.242 U1.41
IO28: HDR2.63 U1.42 | length 63.2
  Bottom Layer w0.2: HDR2.63 39.7,8.4 43.9,4.2 58.7,4.2 64.7,10.2 64.7,25.2 59.158,30.742 U1.42
IO29: HDR2.65 U1.43 | length 58.8
  Bottom Layer w0.2: HDR2.65 40.5,8.4 44.3,4.6 56.6,4.6 58.6,6.6 58.6,10.9 57.7,11.8 57.7,16.8 62.4,21.5 62.4,26.9 59.058,30.242 U1.43
IO30: HDR2.67 U1.44 | length 56.5
  Bottom Layer w0.2: HDR2.67 41.3,8.4 44.7,5 56.4,5 58.2,6.8 58.2,10.7 57.3,11.6 57.3,17 62,21.7 62,26.7 58.958,29.742 U1.44
IO31: HDR2.69 U1.45 | length 54.1
  Bottom Layer w0.2: HDR2.69 42.1,8.4 45.1,5.4 56.2,5.4 57.8,7 57.8,10.5 56.9,11.4 56.9,17.2 61.6,21.9 61.6,26.5 58.858,29.242 U1.45
IO32: HDR2.71 U1.46 | length 51.7
  Bottom Layer w0.2: HDR2.71 42.9,8.4 45.5,5.8 56,5.8 57.4,7.2 57.4,10.3 56.5,11.2 56.5,17.4 61.2,22.1 61.2,26.3 58.758,28.742 U1.46
IO33: HDR2.73 U1.47 | length 49.4
  Bottom Layer w0.2: HDR2.73 43.7,8.4 45.9,6.2 55.8,6.2 57,7.4 57,10.1 56.1,11 56.1,17.6 60.8,22.3 60.8,26.1 58.658,28.242 U1.47
IO34: HDR2.75 U1.48 | length 47
  Bottom Layer w0.2: HDR2.75 44.5,8.4 46.3,6.6 55.6,6.6 56.6,7.6 56.6,9.9 55.7,10.8 55.7,17.8 60.4,22.5 60.4,25.9 58.558,27.742 U1.48
IO35: HDR2.77 U1.49 | length 44.6
  Bottom Layer w0.2: HDR2.77 45.3,8.4 46.7,7 55.4,7 56.2,7.8 56.2,9.7 55.3,10.6 55.3,18 60,22.7 60,25.7 58.458,27.242 U1.49
JIOA0: HDR1.3 U1.149 | length 17.8
  Bottom Layer w0.2: HDR1.3 15.7,59.3 16.1,58.9 16.1,56.1 14.1,54.1 14.1,50.2 16.558,47.742 U1.149
JIOA1: HDR1.5 U1.150 | length 16.9
  Bottom Layer w0.2: HDR1.5 16.5,55.9 14.5,53.9 14.5,50.4 16.658,48.242 U1.150
JIOA2: HDR1.7 U1.151 | length 16.3
  Bottom Layer w0.2: HDR1.7 17.3,59.3 16.9,58.9 16.9,55.7 14.9,53.7 14.9,50.6 16.758,48.742 U1.151
JIOA3: HDR1.9 U1.152 | length 15.8
  Bottom Layer w0.2: HDR1.9 18.1,59.3 17.3,58.5 17.3,55.5 15.3,53.5 15.3,50.8 16.858,49.242 U1.152
JIOB0: HDR1.83 U1.4 | length 14.6
  Bottom Layer w0.2: HDR1.83 47.7,58.1 52.2,53.6 52.2,51.15 50.792,49.742 U1.4
JIOB1: HDR1.85 U1.5 | length 15.2
  Bottom Layer w0.2: HDR1.85 48.5,57.9 52.6,53.8 52.6,50.975 50.867,49.242 U1.5
JIOB2: HDR1.87 U1.6 | length 15.7
  Bottom Layer w0.2: HDR1.87 49.3,57.684 53,53.984 53,50.8 50.942,48.742 U1.6
JIOB3: HDR1.89 U1.7 | length 16.3
  Bottom Layer w0.2: U1.7 51.017,48.242 53.4,50.625 53.4,54.15 50.1,57.45 HDR1.89
KBCLOCK: HDR1.22 U1.134 | length 59.1
  Bottom Layer w0.2: U1.134 17.48,40.242 3.9,53.822 3.9,67.175 9.575,72.85 18.775,72.85 22.9,68.725 HDR1.22
KBDATA: HDR1.24 U1.133 | length 61.5
  Bottom Layer w0.2: U1.133 17.414,39.742 3.5,53.656 3.5,67.375 9.4,73.275 19.092,73.275 23.7,68.667 HDR1.24
LCD_BCKL: HDR2.22 U1.94 | length 8.7
  Bottom Layer w0.2: HDR2.22 22.9,18.026 26.708,21.834 U1.94
LCD_E: HDR2.26 U1.89 | length 9
  Bottom Layer w0.2: HDR2.26 24.5,18.01 29.208,22.718 U1.89
LED0: HDR2.60 U1.62 | length 9
  Bottom Layer w0.2: HDR2.60 38.1,17.94 42.708,22.548 U1.62
LED1: HDR2.62 U1.61 | length 8.9
  Bottom Layer w0.2: HDR2.62 38.9,18.174 43.208,22.482 U1.61
LED2: HDR2.64 U1.60 | length 8.8
  Bottom Layer w0.2: HDR2.64 39.7,18.408 43.708,22.416 U1.60
LED3: HDR2.66 U1.59 | length 8.6
  Bottom Layer w0.2: HDR2.66 40.5,18.643 44.208,22.351 U1.59
LED4: HDR2.68 U1.58 | length 8.5
  Bottom Layer w0.2: HDR2.68 41.3,18.877 44.708,22.285 U1.58
LED5: HDR2.70 U1.57 | length 8.4
  Bottom Layer w0.2: HDR2.70@42.125,16.525 HDR2.70 42.1,19.111 45.208,22.219 U1.57
LED6: HDR2.72 U1.56 | length 8.3
  Bottom Layer w0.2: HDR2.72 42.9,19.346 45.708,22.154 U1.56
LED7: HDR2.74 U1.55 | length 8.1
  Bottom Layer w0.2: HDR2.74 43.7,19.58 46.208,22.088 U1.55
MOUSECLOCK: HDR1.26 U1.132 | length 63.8
  Bottom Layer w0.2: U1.132 17.348,39.242 3.1,53.491 3.1,67.575 9.2,73.675 19.55,73.675 24.5,68.725 HDR1.26
MOUSEDATA: HDR1.28 U1.129 | length 66.6
  Bottom Layer w0.2: U1.129@19.558,37.758 18.283,37.742 2.7,53.325 2.7,67.8 8.975,74.075 19.975,74.075 25.3,68.75 HDR1.28
NetLED1_1: LED1.1 R8.2 | length 2.2
  Top Layer w0.2: R8.2 LED1.1
NetLED1_2: LED1.2 U2.4 | length 2.7
  Top Layer w0.2: LED1.2@20.475,5.5 U2.4
NetLED2_1: LED2.1 R9.2 | length 2.2
  Top Layer w0.2: R9.2 LED2.1
NEXUS_TCK: HDR1.82 U1.9 | length 41.3
  Bottom Layer w0.2: HDR1.82 46.9,69.781 47.919,70.8 55.325,70.8 56.936,69.189 56.936,62.114 58.714,60.336 58.714,54.714 51.242,47.242 U1.9
NEXUS_TDI: HDR1.84 U1.8 | length 38.8
  Bottom Layer w0.2: HDR1.84 47.7,69.683 48.417,70.4 55.159,70.4 56.53,69.029 56.53,61.955 58.314,60.17 58.314,54.939 51.117,47.742 U1.8
NEXUS_TDO: HDR1.76 R5.1 | length 51.2
  Top Layer w0.5: R5.1 v1(55.05,49.35)
  Bottom Layer w0.2: HDR1.76 44.5,69.962 46.138,71.6 60.2,71.6 65.02,66.78 65.02,59.32 v1(55.05,49.35)
NEXUS_TDO#: R5.2 U1.11 | length 6
  Top Layer w0.5: v1(53.101,47.331) 53.101,45.591 R5.2
  Bottom Layer w0.2: U1.11 52.017,46.242 v1(53.101,47.331)
NEXUS_TMS: HDR1.80 U1.10 | length 50.9
  Bottom Layer w0.2: HDR1.80 46.1,69.845 47.455,71.2 60,71.2 64.62,66.58 64.62,60.02 51.342,46.742 U1.10
RAM0_DATA0: HDR2.42 U1.75 | length 9.6
  Bottom Layer w0.2: HDR2.42 30.9,17.688 31.587,18.375 32.044,18.375 36.208,22.539 U1.75
RAM0_DATA1: HDR2.40 U1.81 | length 8.4
  Bottom Layer w0.2: HDR2.40 30.1,19.25 33.208,22.358 U1.81
RAM0_DATA2: HDR2.38 U1.82 | length 8.5
  Bottom Layer w0.2: HDR2.38 29.3,19.016 32.708,22.424 U1.82
RAM0_DATA3: HDR2.36 U1.83 | length 8.6
  Bottom Layer w0.2: HDR2.36 28.5,18.781 32.208,22.489 U1.83
RAM0_DATA4: HDR2.34 U1.84 | length 8.8
  Bottom Layer w0.2: HDR2.34 27.7,18.66 31.708,22.668 U1.84
RAM0_DATA5: HDR2.32 U1.86 | length 8.7
  Bottom Layer w0.2: HDR2.32 26.9,18.58 30.708,22.388 U1.86
RAM0_DATA6: HDR2.30 U1.87 | length 8.8
  Bottom Layer w0.2: HDR2.30 26.1,18.425 30.208,22.533 U1.87
RAM0_DATA7: HDR2.28 U1.88 | length 8.9
  Bottom Layer w0.2: HDR2.28 25.3,18.234 29.708,22.642 U1.88
RAM0_OE: HDR1.41 U1.178 | length 7.6
  Bottom Layer w0.2: HDR1.41 30.9,57.482 32.208,56.174 U1.178
RAM0_WE: HDR1.79 U1.206 | length 8.6
  Bottom Layer w0.2: HDR1.79 46.1,59.675 44.4,57.975 44.4,56.86 46.208,55.052 U1.206
RAM1_DATA0: HDR1.45 U1.180 | length 7.4
  Bottom Layer w0.2: HDR1.45 32.5,57.013 33.208,56.305 U1.180
RAM1_DATA1: HDR1.49 U1.187 | length 8.2
  Bottom Layer w0.2: HDR1.49 34.1,58.675 36.708,56.067 U1.187
RAM1_DATA2: HDR1.53 U1.189 | length 7.9
  Bottom Layer w0.2: HDR1.53 35.7,58.206 37.708,56.198 U1.189
RAM1_DATA3: HDR1.57 U1.192 | length 7.9
  Bottom Layer w0.2: HDR1.57 37.3,57.738 39.208,55.83 U1.192
RAM1_DATA4: HDR1.55 U1.191 | length 8
  Bottom Layer w0.2: HDR1.55 36.5,57.972 38.708,55.764 U1.191
RAM1_DATA5: HDR1.51 U1.188 | length 8.1
  Bottom Layer w0.2: HDR1.51 34.9,58.441 37.208,56.133 U1.188
RAM1_DATA6: HDR1.47 U1.181 | length 7.3
  Bottom Layer w0.2: HDR1.47 33.3,56.779 33.708,56.371 U1.181
RAM1_DATA7: HDR1.43 U1.179 | length 7.5
  Bottom Layer w0.2: HDR1.43 31.7,57.247 32.708,56.239 U1.179
RAM1_OE: HDR1.39 U1.176 | length 7.6
  Bottom Layer w0.2: HDR1.39 30.1,57.716 31.208,56.608 U1.176
RAM1_WE: HDR1.61 U1.194 | length 7.6
  Bottom Layer w0.2: HDR1.61 38.9,57.269 40.208,55.961 U1.194
RAM_ADDR0: HDR1.21 U1.164 | length 8.1
  Bottom Layer w0.2: HDR1.21 22.9,57.362 25.208,55.054 U1.164
RAM_ADDR1: HDR1.25 U1.166 | length 7.8
  Bottom Layer w0.2: HDR1.25 24.5,56.894 26.208,55.186 U1.166
RAM_ADDR2: HDR1.29 U1.168 | length 7.6
  Bottom Layer w0.2: HDR1.29 26.1,56.425 27.208,55.317 U1.168
RAM_ADDR3: HDR1.33 U1.173 | length 7.9
  Bottom Layer w0.2: HDR1.33 27.7,58.419 29.708,56.411 U1.173
RAM_ADDR4: HDR1.65 U1.199 | length 8
  Bottom Layer w0.2: HDR1.65 40.5,56.8 42.708,54.592 U1.199
RAM_ADDR5: HDR1.69 U1.201 | length 7.8
  Bottom Layer w0.2: HDR1.69 42.1,56.332 43.708,54.724 U1.201
RAM_ADDR6: HDR1.73 U1.203 | length 8.2
  Bottom Layer w0.2: HDR1.73 43.7,59.45 42.9,58.65 42.9,56.663 44.708,54.855 U1.203
RAM_ADDR7: HDR1.77 U1.205 | length 8.5
  Bottom Layer w0.2: HDR1.77 45.3,59.55 43.875,58.125 43.875,56.82 45.708,54.987 U1.205
RAM_ADDR8: HDR1.75 U1.204 | length 8.4
  Bottom Layer w0.2: HDR1.75 44.5,59.575 43.3,58.375 43.3,56.829 45.208,54.921 U1.204
RAM_ADDR9: HDR1.71 U1.202 | length 8
  Bottom Layer w0.2: HDR1.71 42.9,59.425 42.5,59.025 42.5,56.498 44.208,54.79 U1.202
RAM_ADDR10: HDR1.67 U1.200 | length 7.9
  Bottom Layer w0.2: HDR1.67 41.3,56.566 43.208,54.658 U1.200
RAM_ADDR11: HDR1.63 U1.198 | length 8.1
  Bottom Layer w0.2: HDR1.63 39.7,57.035 42.208,54.527 U1.198
RAM_ADDR12: HDR1.59 U1.193 | length 7.8
  Bottom Layer w0.2: HDR1.59 38.1,57.503 39.708,55.895 U1.193
RAM_ADDR13: HDR1.35 U1.174 | length 7.8
  Bottom Layer w0.2: HDR1.35 28.5,58.185 30.208,56.477 U1.174
RAM_ADDR14: HDR1.31 U1.169 | length 7.4
  Bottom Layer w0.2: HDR1.31 26.9,56.191 27.708,55.383 U1.169
RAM_ADDR15: HDR1.27 U1.167 | length 7.7
  Bottom Layer w0.2: HDR1.27 25.3,56.659 26.708,55.251 U1.167
RAM_ADDR16: HDR1.23 U1.165 | length 7.9
  Bottom Layer w0.2: HDR1.23 23.7,57.128 25.708,55.12 U1.165
RAM_CS: HDR1.37 U1.175 | length 7.7
  Bottom Layer w0.2: HDR1.37 29.3,57.95 30.708,56.542 U1.175
RED0: HDR1.6 U1.146 | length 32.8
  Bottom Layer w0.2: HDR1.6 16.5,68.5 15.4,69.6 13.8,69.6 12.9,68.7 12.9,49.5 16.158,46.242 U1.146
RED1: HDR1.8 U1.145 | length 35.2
  Bottom Layer w0.2: HDR1.8 17.3,68.5 15.8,70 13.6,70 12.5,68.9 12.5,49.3 16.058,45.742 U1.145
REF_CLK: HDR2.4 U1.185 | length 64.4
  Top Layer w0.2: v1(19.375,23.8) 19.375,24.446 13.971,29.849 13.971,44.292 21.427,51.748 21.427,56.323 22.342,57.237 33.264,57.237 33.67,56.831 v1(34.864,56.831)
  Bottom Layer w0.2: HDR2.4 15.7,17.842 19.375,21.517 v1(19.375,23.8) ; v1(34.864,56.831) 35.708,55.986 U1.185
SCL: HDR2.5 U1.109 | length 29.4
  Bottom Layer w0.2: HDR2.5 16.5,8.5 15.3,7.3 13.6,7.3 12.6,8.3 12.6,10.3 12.9,10.6 12.9,15.6 12.6,15.9 12.6,22.2 18.142,27.742 U1.109
SDA: HDR2.3 U1.108 | length 27.1
  Bottom Layer w0.2: HDR2.3 15.7,8.4 15,7.7 13.8,7.7 13,8.5 13,10.1 13.3,10.4 13.3,15.8 13,16.1 13,22 18.242,27.242 U1.108
SPI_CLK: HDR1.46 U1.18 | length 76.8
  Bottom Layer w0.2: HDR1.46 32.5,72.3 35.6,75.4 58.8,75.4 66.62,67.58 66.62,57.995 51.367,42.742 U1.18
SPI_DIN: HDR1.44 U1.20 | length 79.3
  Bottom Layer w0.2: HDR1.44 31.7,72.1 35.4,75.8 59,75.8 67.02,67.78 67.02,57.83 50.933,41.742 U1.20
SPI_DOUT: HDR1.50 U1.16 | length 72.3
  Bottom Layer w0.2: HDR1.50 34.1,72.7 36,74.6 58.4,74.6 65.82,67.18 65.82,58.37 51.192,43.742 U1.16
SPI_MODE: HDR1.52 U1.15 | length 70.1
  Bottom Layer w0.2: HDR1.52 34.9,72.9 36.2,74.2 58.2,74.2 65.42,66.98 65.42,58.57 51.092,44.242 U1.15
SPI_SEL: HDR1.48 U1.17 | length 74.6
  Bottom Layer w0.2: HDR1.48 33.3,72.5 35.8,75 58.6,75 66.22,67.38 66.22,58.195 51.267,43.242 U1.17
SW0: HDR2.44 U1.74 | length 9.3
  Bottom Layer w0.2: HDR2.44 31.7,17.65 32.025,17.975 32.275,17.975 36.708,22.408 U1.74
SW1: HDR2.46 U1.73 | length 9
  Bottom Layer w0.2: HDR2.46 32.5,17.625 37.208,22.333 U1.73
SW2: HDR2.48 U1.71 | length 9.1
  Bottom Layer w0.2: HDR2.48 33.3,17.613 38.208,22.521 U1.71
SW3: HDR2.50 U1.70 | length 9
  Bottom Layer w0.2: HDR2.50 34.1,17.664 38.708,22.272 U1.70
SW4: HDR2.52 U1.69 | length 8.9
  Bottom Layer w0.2: HDR2.52 34.9,17.613 39.208,21.921 U1.69
SW5: HDR2.54 U1.68 | length 8.8
  Bottom Layer w0.2: HDR2.54 35.7,17.7 39.708,21.708 U1.68
SW6: HDR2.56 U1.64 | length 9.2
  Bottom Layer w0.2: HDR2.56 36.5,17.471 41.708,22.679 U1.64
SW7: HDR2.58 U1.63 | length 9.1
  Bottom Layer w0.2: HDR2.58 37.3,17.706 42.208,22.614 U1.63
SWC0: HDR2.18 U1.96 | length 8.9
  Bottom Layer w0.2: HDR2.18 21.3,17.557 25.708,21.965 U1.96
SWC1: HDR2.16 U1.97 | length 9.2
  Bottom Layer w0.2: HDR2.16 20.5,17.549 20.868,17.918 21.095,17.918 25.208,22.031 U1.97
SWC2: HDR2.14 U1.98 | length 9.5
  Bottom Layer w0.2: HDR2.14 19.7,17.683 20.335,18.318 20.929,18.318 24.708,22.097 U1.98
SWC3: HDR2.6 U1.102 | length 10.7
  Bottom Layer w0.2: HDR2.6 16.5,17.842 18.576,19.918 20.266,19.918 22.708,22.359 U1.102
SWR0: HDR2.20 U1.95 | length 8.8
  Bottom Layer w0.2: HDR2.20 22.1,17.792 26.208,21.9 U1.95
SWR1: HDR2.12 U1.99 | length 9.8
  Bottom Layer w0.2: HDR2.12 18.9,17.664 19.954,18.718 20.763,18.718 24.208,22.162 U1.99
SWR2: HDR2.10 U1.100 | length 10.1
  Bottom Layer w0.2: HDR2.10 18.1,17.771 19.447,19.118 20.598,19.118 23.708,22.228 U1.100
SWR3: HDR2.8 U1.101 | length 10.3
  Bottom Layer w0.2: HDR2.8 17.3,17.74 19.078,19.518 20.432,19.518 23.208,22.294 U1.101
TEST: HDR1.81 U1.3 | length 14
  Bottom Layer w0.2: HDR1.81 46.9,58.25 51.7,53.45 51.7,51.25 50.692,50.242 U1.3
VCC: C1.1 C3.1 C5.2 C6.2 C7.2 C8.2 C9.2 C10.2 C11.2 C12.2 C19.1 C20.1 C21.1 C22.1 C23.1 C24.1 C25.1 C26.1 C33.1 HDR1.34 HDR1.94 HDR1.96 HDR2.94 HDR2.96 R1.2 R6.2 R7.2 R8.1 R9.1 U1.13 U1.26 U1.38 U1.53 U1.66 U1.78 U1.91 U1.105 U1.118 U1.130 U1.143 U1.156 U1.171 U1.184 U1.196 U1.208 U2.5 | length 385
  Top Layer w0.25: R6.2 19.808,19.992 20.208,20.392 20.208,24.992 20.758,25.542 v1(21.508,25.542) ; R8.1 14.45,4.45 14.8,4.1 26.2,4.1 27.1,5 27.1,8.6 28.55,10.05 42.45,10.05 44.45,8.05 R9.1 ; U2.5 24.15,10.05 24.9,9.3 24.9,4.1 ; v1(27.701,69.505) 30.47,66.737 40.477,66.737 43.449,63.765 43.449,53.452 43.189,53.192 C7.2 ; 33.5,10.05 33.5,20.4 33,20.9 32.4,20.9 32.1,21.2 32.1,23.3 32.592,23.792 C24.1
  Top Layer w0.5: C12.2 21.108,31.342 ccw(c21.108,31.742) 21.508,31.742 v1(21.508,32.242) ; C11.2 21.108,39.142 cw(c21.108,38.742) 21.508,38.742 v1(21.508,38.242) ; C10.2 20.808,45.442 v1(21.508,44.742) ; C19.1 v1(21.508,25.542) ; v1(22.265,51.217) 22.9,51.852 C9.2 ; C23.1 27.508,24.842 v1(28.208,25.542) ; C5.2 28.008,52.142 v1(28.708,51.442) ; C24.1 33.608,25.142 34.008,25.542 v1(34.708,25.542) ; C6.2 34.308,51.842 ccw(c34.708,51.842) 34.708,51.442 v1(35.208,51.442) ; v1(40.708,25.542) 41.408,24.842 C25.1 ; v1(41.208,51.442) 41.708,51.442 ccw(c41.708,51.842) 42.108,51.842 C7.2 ; v1(47.408,25.542) 47.908,25.042 C26.1 ; v1(47.408,32.742) 47.408,32.242 ccw(c47.808,32.242) 47.808,31.842 C22.1 ; v1(47.408,38.742) 47.408,39.242 cw(c47.808,39.242) 47.808,39.642 C21.1 ; v1(47.408,45.242) 48.008,45.242 48.308,45.542 C20.1 ; v1(47.408,51.642) 47.908,52.142 C8.2
  Top Layer w1: v1@51.018,68.819 v1(51.275,69.075) v1(52.375,69.075)
  Top Layer w1.5: C1.1 30.608,46.492 ; 38.308,30.492 C3.1 ; v1(44.958,51.742) 44.958,55.098 48.75,58.89 48.75,66.55 v1@51.018,68.819 ; v1(47.708,28.692) 50.815,25.589 v1(50.815,18.502) ; v1(26.458,30.492) v1(26.458,46.492) v1(42.458,46.492) v1(42.458,30.492) v1(26.458,30.492)
  Bottom Layer w0.25: U1.105 20.608,25.742 20.808,25.542 v1(21.508,25.542) ; U1.118 v1(21.508,32.242) ; U1.130 v1(21.508,38.242) ; U1.143 v1(21.508,44.742) ; U1.156 21.96,51.242 v1(22.265,51.217) ; HDR1.34 v1(27.701,69.505) ; U1.91 v1(28.208,25.542) ; v1(28.708,51.442) U1.171 ; U1.78 v1(34.708,25.542) ; v1(35.208,51.442) U1.184 ; U1.66 v1(40.708,25.542) ; v1(41.208,51.442) U1.196 ; U1.53 47.208,24.642 47.408,24.842 v1(47.408,25.542) ; U1.208 47.208,52.442 47.408,52.242 v1(47.408,51.642) ; v1(47.408,32.742) U1.38 ; v1(47.408,38.742) U1.26 ; v1(47.408,45.242) U1.13 ; v1(50.815,18.502) 51.7,17.617 HDR2.94 ; v1(50.815,19.518) 52.5,17.833 HDR2.96 ; v1(51.275,69.075) 51.7,68.65 HDR1.94 ; v1(52.375,69.075) 52.5,68.95 HDR1.96
  Bottom Layer w0.5: v1(21.508,25.542) v1(26.458,30.492) ; v1(21.508,32.242) v1(26.458,32.242) ; v1(21.508,38.242) v1(26.458,38.242) ; v1(21.508,44.742) v1(26.458,44.742) ; v1(22.265,51.217) 22.265,49.871 25.644,46.492 v1(26.458,46.492) ; v1(28.208,25.542) v1(28.208,30.492) ; v1(28.708,46.492) v1(28.708,51.442) ; v1(34.708,25.542) v1(34.708,30.492) ; v1(35.208,46.492) v1(35.208,51.442) ; v1(40.708,25.542) v1(40.708,30.492) ; v1(41.208,46.492) v1(41.208,51.442) ; v1(42.458,32.742) v1(47.408,32.742) ; v1(42.458,38.742) v1(47.408,38.742) ; v1(42.458,45.242) v1(47.408,45.242) ; 43.808,30.492 43.808,29.142 v1(47.408,25.542) ; 44.958,50.233 45.999,50.233 v1(47.408,51.642)
  Bottom Layer w1.2: v1(42.458,30.492) 44.955,30.492 cw(c44.955,28.192) 46.582,29.819 v1(47.708,28.692) ; v1(42.458,46.492) 42.458,47.733 44.958,50.233 v1(44.958,51.742)
VCCINT: C2.1 C4.1 C13.2 C14.2 C15.2 C16.2 C17.2 C18.2 C27.1 C28.1 C29.1 C30.1 C31.1 C32.1 HDR1.93 HDR1.95 HDR2.93 HDR2.95 R2.1 U1.14 U1.28 U1.37 U1.67 U1.76 U1.90 U1.119 U1.128 U1.142 U1.172 U1.186 U1.195 | length 242.9
  Top Layer w0.5: C18.2 21.008,33.942 v1(21.508,33.442) ; C17.2 21.008,36.542 v1(21.508,37.042) ; C16.2 20.808,42.842 v1(21.508,43.542) ; v1(29.408,25.542) 30.108,24.842 C30.1 ; v1(29.908,51.442) 30.608,52.142 C13.2 ; v1(35.908,25.542) 35.908,24.942 36.208,24.642 C31.1 ; v1(36.408,51.442) 36.908,51.942 C14.2 ; C32.1 38.808,24.842 v1(39.508,25.542) ; C15.2 39.508,51.942 v1(40.008,51.442) ; v1(47.408,33.942) 47.908,34.442 C29.1 ; v1(47.408,37.542) 47.908,37.042 C28.1 ; v1(47.408,44.042) 47.408,43.342 47.808,42.942 C27.1
  Top Layer w1: v1@48.783,8.037 v1(49,7.8) v1(50.2,7.8) ; v1(52.95,58.45) 52.95,59.85 R2.1
  Top Layer w1.5: C4.1 v1(32.808,33.792) ; v1(36.108,43.192) C2.1 ; v1(44.208,25.242) 44.208,19.623 49,14.831 v1(49,7.8) ; v1(47.708,48.242) 49.72,48.242 52.95,51.473 v1(52.95,58.45) ; 24.708,28.742 44.208,28.742 44.208,48.242 24.708,48.242 24.708,28.742
  Bottom Layer w0.25: U1.119 20.808,32.742 v1(21.508,33.442) ; U1.128 20.608,37.242 20.808,37.042 v1(21.508,37.042) ; U1.142 20.808,44.242 v1(21.508,43.542) ; U1.90 28.708,24.842 v1(29.408,25.542) ; U1.172 29.208,52.142 v1(29.908,51.442) ; U1.76 35.708,24.642 35.908,24.842 v1(35.908,25.542) ; U1.186 36.208,52.342 36.408,52.142 v1(36.408,51.442) ; v1(39.508,25.542) 40.208,24.842 U1.67 ; v1(40.008,51.442) 40.708,52.142 U1.195 ; v1(47.408,33.942) 48.108,33.242 U1.37 ; v1(47.408,37.542) 48.108,37.542 48.308,37.742 U1.28 ; v1(47.408,44.042) 48.108,44.742 U1.14 ; v1(49,7.8) 49.65,8.425 51.525,8.425 51.7,8.6 HDR2.93 ; v1(50.2,7.8) 51.85,7.8 52.5,8.45 HDR2.95 ; 51.7,59.3 HDR1.93 51.7,58.575 52.75,57.525 v1(52.949,57.44) ; 52.5,59.425 HDR1.95 52.5,58.9 v1(52.95,58.45)
  Bottom Layer w0.5: v1(21.508,33.442) v1(24.708,33.442) ; v1(21.508,37.042) v1(24.708,37.042) ; v1(21.508,43.542) v1(24.708,43.542) ; v1(29.408,25.542) v1(29.408,28.742) ; v1(29.908,48.242) v1(29.908,51.442) ; v1(35.908,25.542) v1(35.908,28.742) ; v1(36.408,48.242) v1(36.408,51.442) ; v1(39.508,25.542) v1(39.508,28.742) ; v1(40.008,48.242) v1(40.008,51.442) ; v1(44.208,33.942) v1(47.408,33.942) ; v1(44.208,37.542) v1(47.408,37.542) ; v1(44.208,44.042) v1(47.408,44.042)
  Bottom Layer w1.2: v1(42.358,28.742) 44.208,26.892 v1(44.208,25.242) ; v1(44.175,46.625) 45.05,47.525 47,47.525 v1(47.708,48.242)
  Bottom Layer w1.5: v1(32.808,28.742) v1(32.808,33.792) ; v1(36.108,43.192) 38.108,45.192 v1(38.108,48.242)
VDRIVE: HDR1.20 U1.135 | length 56.7
  Bottom Layer w0.2: U1.135 17.545,40.742 4.3,53.988 4.3,66.975 9.75,72.425 18.325,72.425 22.1,68.65 HDR1.20
VREF: HDR1.91 R2.2 R3.1 | length 13.4
  Top Layer w0.5: v1(55,56.775) R2.2@55,60.5 ; R2.2 R3.1
  Bottom Layer w0.25: HDR1.91 50.9,58.117 52.568,56.45 54.675,56.45 v1(55,56.775)
pads on no net: HDR1.86 HDR1.88 HDR1.90 HDR1.92 HDR1.MH1 HDR1.MH2 HDR1.MH3 HDR1.MH4 HDR1.MH5 HDR1.MH6 HDR2.76 HDR2.78 HDR2.79 HDR2.80 HDR2.81 HDR2.82 HDR2.83 HDR2.84 HDR2.85 HDR2.86 HDR2.87 HDR2.88 HDR2.89 HDR2.90 HDR2.91 HDR2.92 HDR2.MH1 HDR2.MH2 HDR2.MH3 HDR2.MH4 HDR2.MH5 HDR2.MH6 U1.FID1 U1.FID2 U2.1

## Polygon pours and split planes (outlines as drawn)
GND on Top Layer "Top Layer-GND" (solid, remove dead copper, pour order 1000): 0,0 69,0 69,81 0,81
GND on Bottom Layer "Bottom Layer-GND" (solid, remove dead copper, pour order 1001): 0,0 69,0 69,81 0,81

## Keep-outs
Keep-Out Layer:
  the board outline again, w0.8

## Other copper
Bottom Layer:
  text "1" at 48.908,51.892 h1 r270

## Silkscreen, mask and mechanical layers (free items; w line width, h text height)
Bottom Overlay:
  drawing of 850 lines, arcs and shapes, not listed
  text "REV 1.02" at 47.6,76.5 h1.3
  text "NBP1" at 54.5,76.5 h1.3
  text "1" at 13.97,58.42 h1
  text "1" at 13.462,7.493 h1
PCB Boundary:
  the board outline again, w0.25
  text "PCB boundary coincides with centre-line of tracks" at 0,-12 h0.75
Gerber ID:
  text ".Layer_Name" at 0,-6 h0.75
Printout ID:
  text ".Printout_Name" at 0,-10 h0.75
Drill Drawing:
  text ".Legend" at 0,-8 h0.75